# Altium PCB stencil.PcbDoc (part 2 of 2)
Units mil, origin at the board's own origin, x right, y up, seen from the top; angles counter-clockwise.
Board outline 6000 x 6360 mil, 2 copper layers (Top Layer, Bottom Layer); 167 components, 0 nets, 527 pads, 94 vias.
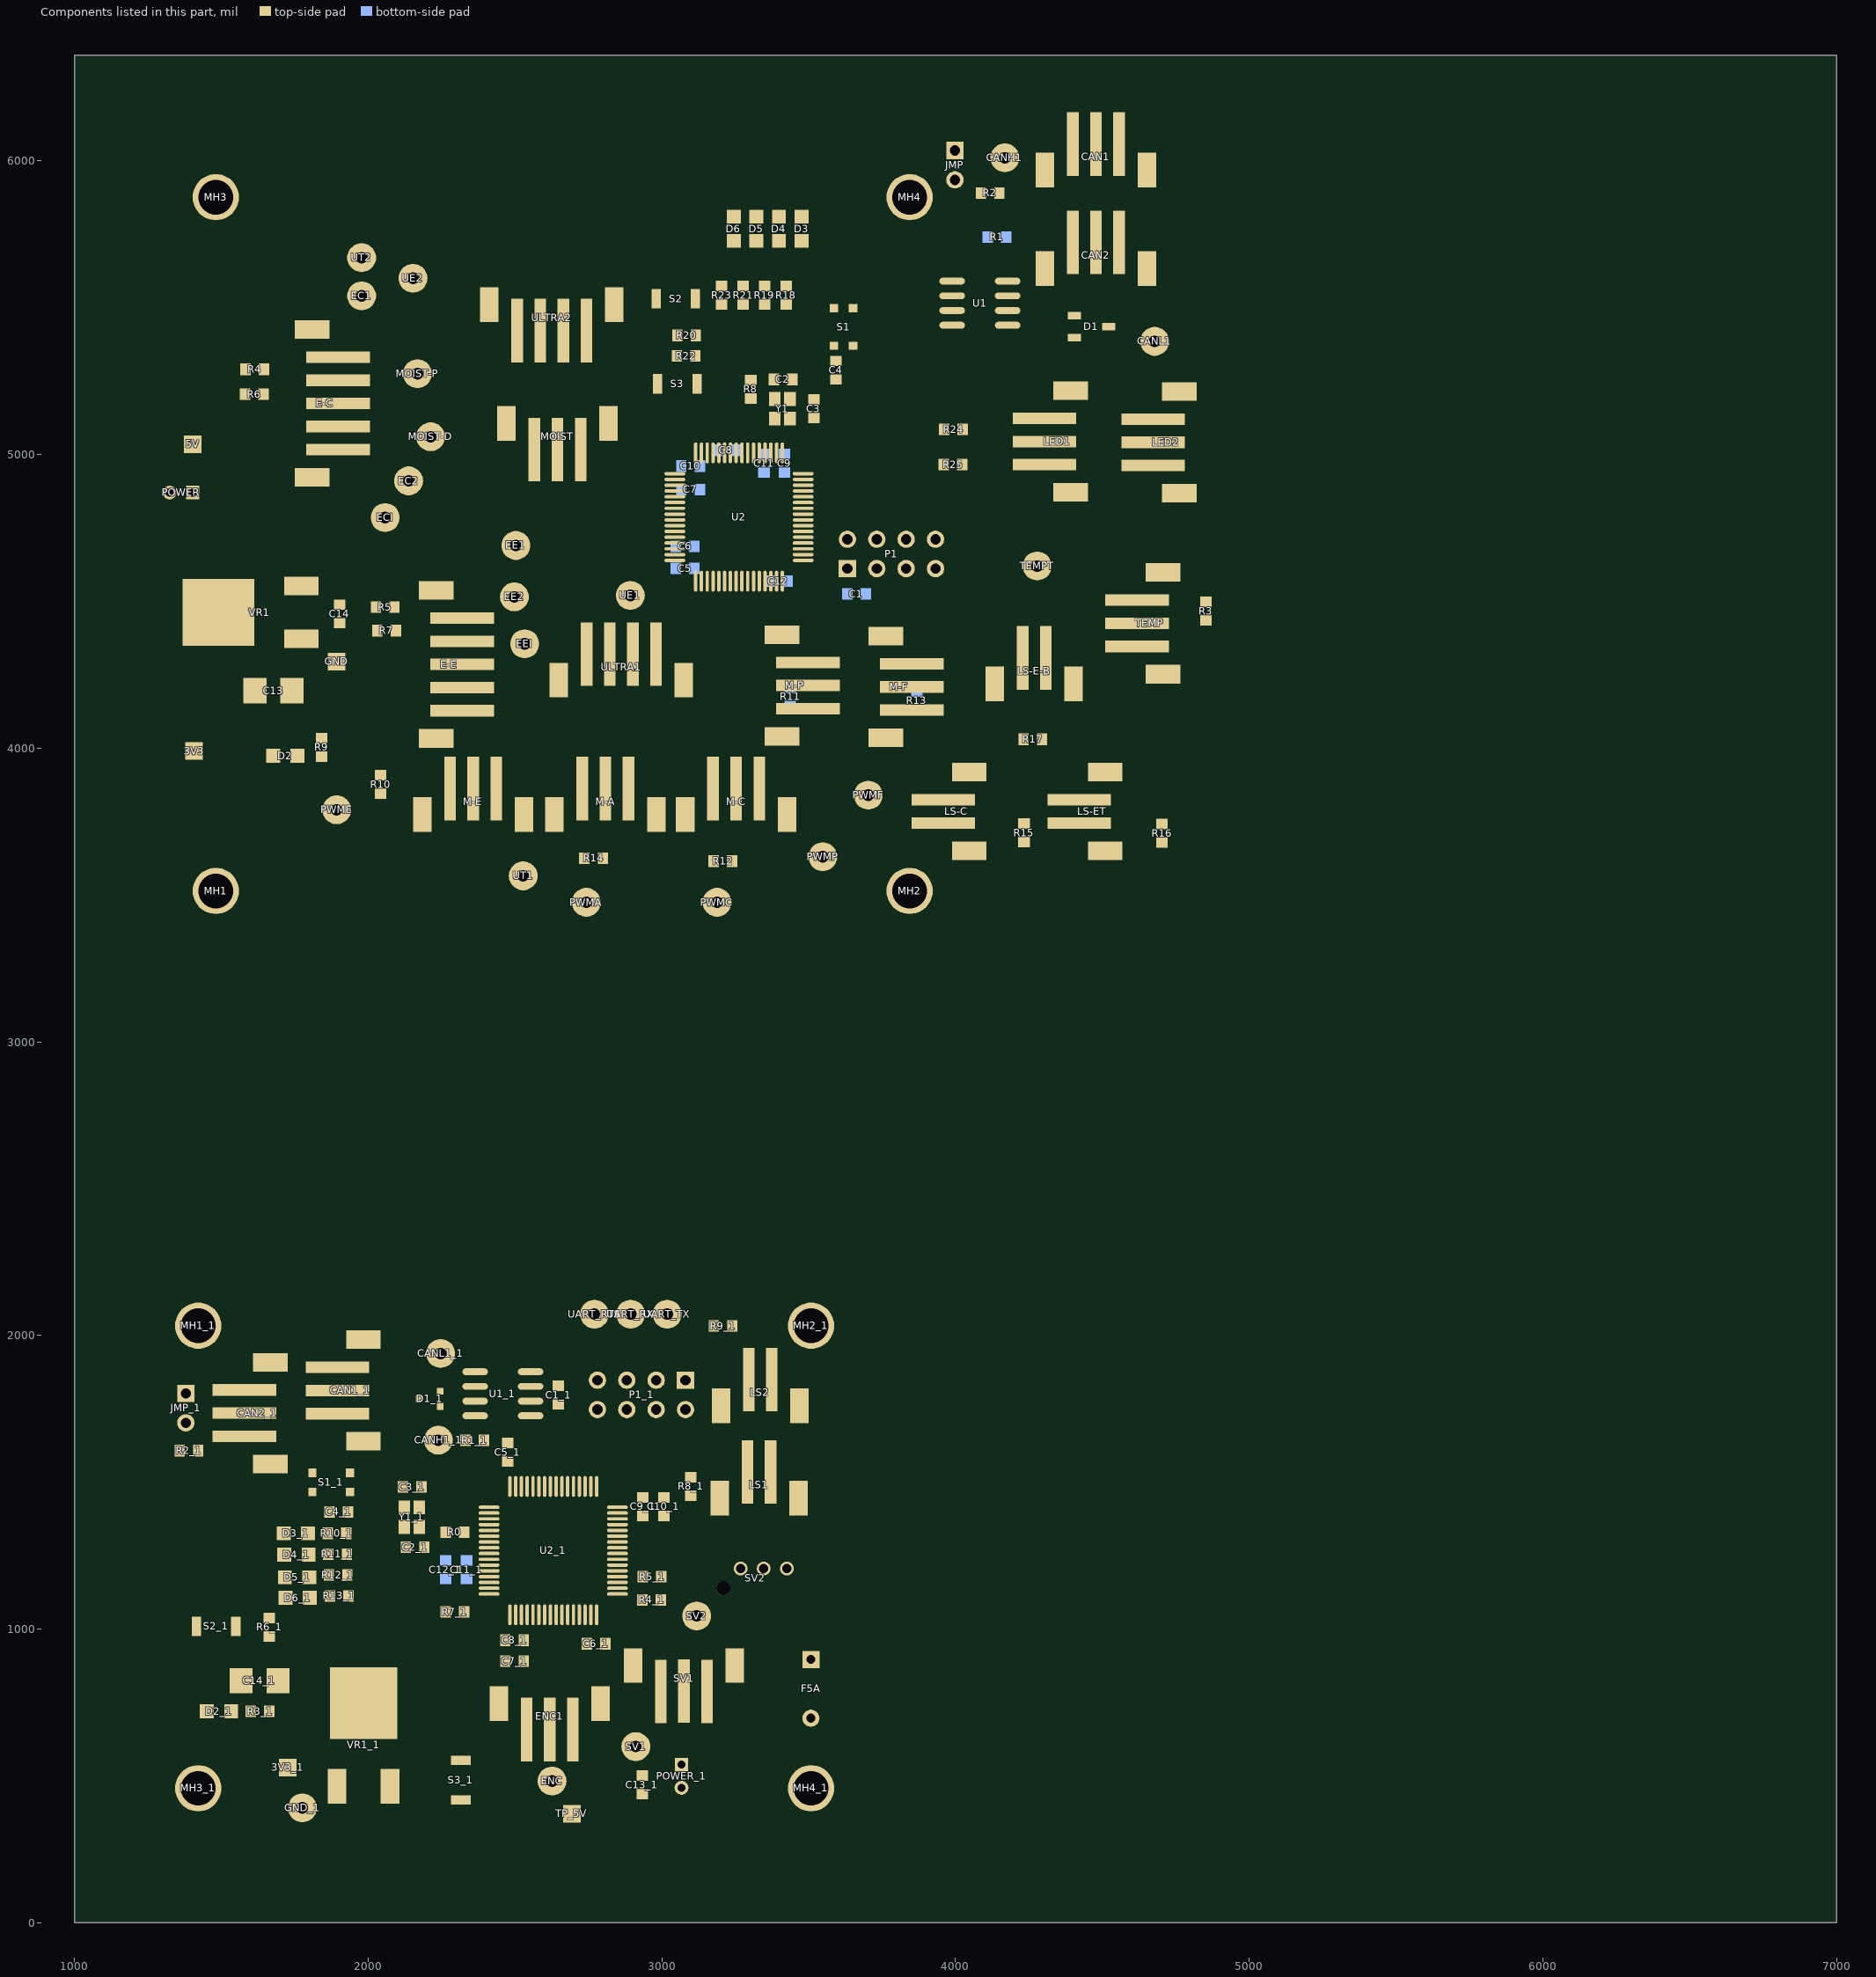
[diagram p2: the components of this part, seen from the top]

## Via types
v1: diameter 28, hole 16, Top Layer to Bottom Layer, 54 vias
v2: diameter 50, hole 28, Top Layer to Bottom Layer, 40 vias

## Nets (pads, with @x,y where several pads share a name; then routed paths per layer and width w, separated by ;. In a path a pad name is that pad's centre, name@x,y a point inside that pad or via, vN(x,y) a via of type N, cw(c..) or ccw(c..) an arc to the next point about the centre after c; other vN are vias at no path point) (continued)
copper on no net: | length 111157.8
  Top Layer w10: 1358.74,1608.11 1371.46,1620.82 1371.46,1694.51 1379.51,1702.56 ; 1379.51,1802.56 1446.36,1735.71 1579.21,1735.71 1729.94,1735.71 1806.95,1812.72 1895.53,1812.72 1963.07,1812.72 1967.01,1816.65 2043.78,1816.65 2165.83,1938.7 2247.01,1938.7 2246.28,1937.97 2246.28,1811.74 ; 1415.83,1009.57 1415.83,991.85 1461.1,946.57 v2(1461.1,840.28) ; 1421.73,1608.11 1421.73,1610.07 1453.95,1642.29 1564.53,1642.29 1579.21,1656.97 1593.9,1671.66 1713.56,1671.66 1761.19,1719.29 1880.85,1719.29 1895.53,1733.98 2041.81,1733.98 2132.36,1643.43 2239.1,1643.43 2239.1,1707.64 2245.55,1714.09 2245.55,1758.84 2245.55,1759.82 2262.3,1776.57 2364.37,1776.57 ; 1451.09,720.2 1461.1,730.21 v2(1461.1,840.28) ; 1533.77,720.2 1600.87,720.2 ; 1549.68,1009.57 1598.29,1009.57 1614.34,1025.61 1653.41,1025.61 1663.86,1036.06 ; 1579.21,1814.45 1591.33,1826.57 v2(1736.69,1826.57) 1763.05,1826.57 1781.88,1845.4 1814.24,1877.77 1881.84,1877.77 1895.53,1891.46 ; 1598.9,824.53 1598.9,826.5 1585.12,840.28 v2(1461.1,840.28) ; v1(1608.57,3973.85) 1676.65,3973.85 ; 1644.49,5205 1762.99,5205 1807.99,5250 ; 1645.99,5290 1772.99,5290 1812.99,5330 ; 1663.86,1038.33 1690.22,1064.69 2179.07,1064.69 2273.56,1159.17 2411.92,1159.17 ; v1@1679.25,5016.26 1897.99,5016.26 ; 1718.98,1106.88 1718.98,1174.75 1716.84,1176.89 1716.84,1251.66 1714.84,1253.66 1714.84,1324.56 1712.9,1326.5 1703.23,1336.17 v2(1703.23,1399.33) 1868.42,1399.33 ; 1759.33,3973.85 1839.1,3973.85 1842.05,3970.9 ; 1772.84,4371.95 1895.95,4371.95 v1(1897.99,4369.91) ; 1772.84,4551.87 1805.99,4551.87 1869.46,4488.41 1902.99,4488.41 ; 1776.06,371.77 1776.06,391.46 1776.06,468.23 v2(1815.43,507.6) 1868.27,507.6 1894.76,481.1 1894.76,465.08 ; 1795.58,1326.5 1862.68,1326.5 ; 1797.52,1253.66 1862.84,1253.66 1864.65,1255.46 ; 1799.52,1176.89 1859.07,1176.89 1866.61,1184.43 ; 1801.65,1106.88 1864.04,1106.88 1870.55,1113.4 ; 1810.51,1532.28 1810.51,1531.3 1855.87,1485.94 1855.87,1411.88 1868.42,1399.33 ; 1868.58,1399.16 1868.42,1399.33 ; 1882.99,4290 1897.99,4305 v1(1897.99,4369.91) ; 1897.99,5252.48 1990.51,5252.48 ; 1902.99,3805 2005.99,3907.99 2042.99,3907.99 2270.99,3907.99 2277.99,3915 ; 1902.99,4425.42 1902.99,4374.91 v1(1897.99,4369.91) ; 1925.67,1326.5 1948.39,1326.5 2051.03,1223.85 2234.31,1223.85 2287.39,1276.94 2411.57,1276.94 2411.92,1277.28 ; 1927.64,1255.46 1993.96,1255.46 2043.58,1205.85 2243.87,1205.85 2295.61,1257.6 2411.92,1257.6 ; 1929.61,1184.43 1933.03,1187.85 2251.32,1187.85 2301.38,1237.91 2411.92,1237.91 ; 1933.54,1113.4 2202.32,1113.4 2307.15,1218.23 2411.92,1218.23 ; 1938.46,1467.32 1938.46,1406.05 1931.57,1399.16 1931.57,1391.46 2081.18,1241.85 2226.85,1241.85 2281.62,1296.62 2411.57,1296.62 2411.92,1296.97 2412.09,1296.8 2493.69,1296.8 v2(2493.87,1296.62) ; 1977.99,5540 1977.99,5340 1982.99,5335 ; 1977.99,5670 2052.99,5745 2502.99,5745 2667.99,5580 2667.99,5435 ; 1987.99,5175 2044.99,5118 2044.99,4803 2060.49,4787.5 ; 1987.99,5255 1990.51,5252.48 ; 1987.99,5325 2092.99,5220 2092.99,5075 2327.99,4840 2532.99,4840 2556.55,4816.44 3044.49,4816.44 3049.49,4816.44 ; v1@2037.99,3765 2042.99,3770 2042.99,3845 ; 2057.99,4785 2062.55,4780.44 2322.55,4780.44 ; v2(2065.43,1777.28) 2069.01,1780.86 2169.14,1780.86 2172.72,1784.43 ; 2074.68,437.52 2074.68,465.08 ; 2089.49,4480 2124.49,4445 2257.99,4445 ; 2094.49,4400 2134.49,4360 2262.99,4360 ; 2118.58,1483.98 2118.58,1482.01 2068.03,1431.46 2068.03,1392.09 v2(2067.4,1391.46) 2067.4,1341.91 2128.43,1280.89 2128.43,1278.92 ; 2123.17,1405.07 2128.09,1409.99 ; 2123.17,1414.91 2137.85,1429.6 2137.85,1440.11 2181.72,1483.98 2183.54,1483.98 ; 2152.99,5600 2497.99,5600 2577.99,5520 ; 2167.99,5275 2552.99,5275 2717.99,5110 ; v1(2172.99,4130) 2172.99,4125 2175.51,4127.52 2320,4127.52 ; 2174.35,1338.14 2178.7,1333.79 2178.7,1281.79 2191.42,1269.07 2191.42,1271.04 2204.13,1283.76 2229.22,1283.76 2264.08,1318.62 2264.08,1320.59 ; 2174.35,1414.91 2177.38,1411.88 v2(2234.31,1411.88) ; 2183.54,1472.17 2183.54,1474.13 ; 2183.54,1482.01 2196.26,1469.29 2244,1469.29 2357.79,1355.5 2357.79,1353.89 2374.99,1336.69 2411.57,1336.69 2411.92,1336.34 ; 2212.99,5060 2357.99,5205 2577.99,5205 2642.99,5140 2642.99,5090 ; 2245.55,1810.02 2246.28,1810.75 2246.28,1811.74 ; 2279.25,3915 2279.25,3956.26 2417.99,4095 3112.99,4095 3136.99,4119 3136.99,4566.46 3135.04,4568.41 ; 2291.81,411.14 2309.53,411.14 2453.79,555.4 2540.91,555.4 2555.59,570.09 2555.59,658.67 ; 2291.81,545 2309.53,545 2309.53,987.91 2327.11,1005.49 2327.11,1058.78 2339.82,1071.5 2339.82,1103.97 2374.99,1139.14 2411.57,1139.14 2411.92,1139.49 ; 2322.99,4780 2322.55,4780.44 ; 2325,4363.74 2416.73,4363.74 2472.99,4420 2472.99,4490 2497.99,4515 ; 2327.08,1320.59 2331.01,1316.65 2411.89,1316.65 ; 2331.18,1642.75 2323.31,1634.87 2323.31,1586.06 v2@2332.87,1576.5 ; 2357.99,3852.01 2357.99,3862.01 2357.99,3950 2482.99,4075 3127.54,4075 3154.99,4102.46 3154.99,4568 ; 2357.99,4455 2362.99,4460 ; 2362.99,4455 2362.99,4460 ; 2364.37,1726.57 2391.82,1726.57 2391.82,1649.04 2398.11,1642.75 ; 2364.37,1826.57 2261.12,1826.57 2246.28,1811.74 ; 2411.57,1356.37 2411.92,1356.02 ; 2411.92,1178.86 2412.09,1179.03 2569.71,1179.03 v2(2569.89,1179.2) ; 2411.92,1198.54 2412.27,1198.89 2453.57,1198.89 2484.72,1230.04 v2(2492.6,1230.04) ; 2411.92,1415.08 2482.79,1415.08 ; 2417.99,4120 2422.39,4124.4 ; 2422.99,4295 2482.99,4355 2532.99,4355 2557.99,4355 ; v1(2432.99,5335) 2433.5,5334.49 2507.48,5334.49 2507.48,5421.42 ; 2436.73,3852.01 2436.73,3701.26 2437.99,3700 v1(2437.99,3695) ; 2463.88,967.25 2467.01,964.12 ; 2467.01,891.12 2467.01,964.12 ; 2467.01,962.16 2467.01,964.12 ; 2474.88,1570.76 2482.79,1562.85 2482.79,1485.94 ; 2482.99,4670 2362.99,4550 2362.99,4460 ; v2(2496.53,1127.68) 2502.12,1122.09 2502.12,1049.28 2502.47,1048.94 2502.47,998.5 2494.95,990.98 2493.87,990.98 2467.01,964.12 ; 2502.82,1485.6 2502.47,1485.94 2502.47,1542.56 2507.57,1547.66 2507.57,1603.03 2476.85,1633.75 2474.88,1633.75 2472.91,1633.75 2476.85,1637.69 v2(2476.85,1694.61) 2479.88,1697.64 2479.88,1734.61 2521.85,1776.57 2553.35,1776.57 2636.9,1776.57 2648,1765.47 ; 2502.99,4530 2707.99,4735 2917.99,4735 2920.7,4737.7 2950.45,4737.7 2950.75,4738 3044.19,4738 3044.49,4737.7 ; 2507.99,4710 2553.7,4755.7 2942.99,4755.7 ; 2522.16,1485.94 2522.16,1536.79 2525.57,1540.2 2525.57,1720.28 2531.86,1726.57 2553.35,1726.57 ; 2530,962.16 2522.16,970 2522.16,1048.94 2522.5,1049.28 2522.5,1087.55 2569.89,1134.93 ; 2541.84,1485.94 2542.19,1486.29 2542.19,1531.37 2543.57,1532.75 2543.57,1566.44 2690.02,1712.9 2690.02,1845.61 2659.05,1876.57 2553.35,1876.57 ; 2557.99,4350 2557.99,4355 ; v1(2562.99,5160) 2562.99,5165 2566.02,5168.03 2566.02,5016.42 ; 2567.99,4355 2557.99,4355 ; 2577.99,5510 2577.99,5520 ; 2582.99,5515 2577.99,5520 ; 2586.22,5421.42 2587.99,5419.65 2587.99,5330 2732.99,5185 2857.99,5185 3042.99,5000 3042.99,4935 ; 2618.58,658.67 2618.58,800.91 2677.64,859.96 2677.64,962.29 2719.01,1003.66 2719.01,1048.94 ; 2626.46,483.18 2626.46,650.8 2634.33,658.67 2634.33,747.26 ; 2644.76,5016.42 2644.76,4928.23 2717.99,4855 3037.99,4855 ; 2664.96,5421.42 2664.96,5333.03 2794.99,5203 2879.99,5203 3062.99,5020 3112.99,5020 ; 2669.41,347.8 2685.51,363.9 2693.39,371.77 ; 2679.64,1485.94 2679.64,1627.71 2708.02,1656.09 2708.02,1785.23 2770.55,1847.76 ; v1(2682.99,4440) 2687.99,4440 2707.99,4460 2822.99,4460 ; 2697.32,658.67 2697.32,570.09 2712.01,555.4 2845.15,555.4 2902.8,497.76 ; 2719.01,1485.94 2719.01,1633.24 2732.76,1646.99 2732.76,1762.7 2762.34,1792.28 2815.08,1792.28 2870.55,1847.76 ; 2723.5,5016.42 2723.5,4929.49 2777.99,4875 3037.99,4875 ; 2729.25,3625 2729.25,3862.01 2729.25,3936.26 2727.99,3937.52 2727.99,4015 2762.99,4050 3127.99,4050 3172.99,4095 3172.99,4570 ; 2732.76,962.16 2732.76,964.12 2758.38,989.74 2758.38,1048.94 2758.03,1049.28 2758.03,1087.64 2736.69,1108.98 v2(2736.69,1119.81) ; 2732.99,3625 2737.99,3620 2737.99,3475 ; 2738.69,1485.94 2738.69,1529.28 2827.45,1618.04 2827.45,1757.39 2836.26,1766.2 2872.34,1802.28 2925.08,1802.28 2970.55,1847.76 ; v2(2764.25,1359.96) 2775.08,1359.96 2790.82,1375.71 2848.93,1375.71 ; 2770.55,2078.46 2775.67,2073.35 2775.67,1852.87 2780.79,1847.76 ; v2(2776.06,1682.8) 2778.43,1685.16 2778.43,1745.39 2780.79,1747.76 ; 2778.06,1048.94 2778.06,981.81 2795.75,964.12 2795.75,962.16 ; 2778.06,1485.94 2778.06,1499.75 2880.79,1602.48 2880.79,1747.76 ; 2799.49,3625 v1(2852.99,3625) ; 2807.99,3862.01 2807.99,4010 2829.99,4032 3135.45,4032 3192.99,4089.54 3192.99,4555 ; 2822.99,4320 2822.99,4460 ; 2848.93,1139.49 2849.27,1139.14 2896.32,1139.14 2933.74,1101.72 2933.74,1099.75 2946.46,1087.04 2946.46,1013.3 2981.85,977.91 2981.85,878.58 2996.54,863.9 2996.54,787.71 2996.54,714.29 2911.44,629.19 2911.44,600.41 ; 2848.93,1178.86 2935.34,1178.86 2935.51,1178.69 2935.51,1180.66 2969.15,1214.29 3244.57,1214.29 3260.32,1198.54 3260.32,1111.93 3209.13,1060.75 3157.95,1060.75 3150.08,1052.87 3118.58,1052.87 ; 2848.93,1277.28 3178.3,1277.28 3233.94,1332.93 3283.94,1382.92 3283.94,1527.45 ; 2848.93,1336.34 2912.88,1336.34 2926.66,1322.56 v2(2937.48,1322.56) ; 2848.93,1395.39 2926.1,1395.39 2935.71,1385.79 2935.94,1385.55 3006.74,1385.55 3006.98,1385.79 3009.18,1383.58 v2(3067.4,1383.58) ; 2848.93,1415.08 2900.04,1415.08 2933.74,1448.78 2935.71,1448.78 ; 2880.79,1847.76 2887.48,1854.45 2887.48,2073.74 2894.17,2080.43 ; 2886.73,3862.01 2886.73,3726.26 v1(2887.99,3725) ; 2892.99,4520 2892.99,4625 2947.99,4680 3047.99,4680 ; 2901.73,4320 2901.73,4513.74 2902.99,4515 ; 2942.99,4756.91 3015.84,4756.91 ; v1(2967.99,4905) 2972.99,4910 2987.81,4895.18 3044.49,4895.18 ; 2977.99,4581.91 2977.99,4600.69 3016.58,4639.28 3044.49,4639.28 ; 2980.47,4320 2980.47,4462.48 v1(2982.99,4465) ; v1@2980.67,4655 2977.99,4652.32 v1(2977.99,4650) 2986.96,4658.96 3044.49,4658.96 3042.8,4657.28 ; 2980.79,1847.76 3018.19,1885.16 3018.19,2072.56 ; 2981.06,5530 v1(3047.99,5530) ; 2986.07,5240 v1(3047.99,5240) ; v1@2992.99,4965 2992.99,4930 3008.13,4914.87 3044.49,4914.87 ; 2996.73,1099.75 3008.18,1111.2 3031.24,1111.2 v2@3041.81,1121.77 ; 2996.73,1176.92 2998.5,1178.69 3009.42,1167.77 3031.24,1167.77 3041.81,1157.2 v2(3041.81,1137.52) v2@3041.81,1121.77 ; 3037.99,4699 2891.99,4699 2822.99,4630 2822.99,4460 ; 3043.86,4835.5 3044.49,4836.13 ; 3044.49,4718.02 3043.47,4717 3007.92,4717 3004.92,4720 2958.2,4720 2955.2,4717 2874.99,4717 2557.99,4400 2557.99,4355 ; 3044.49,4777.07 3012.9,4777.07 3009.97,4780 2660.61,4780 2660.17,4780.44 2322.55,4780.44 ; 3044.49,4796.76 3042.8,4798.44 2549.1,4798.44 2542.54,4805 2222.99,4805 2062.99,4965 2062.99,5180 1990.51,5252.48 ; 3067.18,538.74 3067.18,796.16 3075.28,804.26 ; 3098.9,1517.79 3101.75,1520.64 3277.13,1520.64 3283.94,1527.45 ; 3114.49,5335 3114.49,5248.5 3117.99,5245 ; 3114.92,5530 3114.92,5403.07 3117.99,5400 ; 3115.99,5405 3153.04,5367.94 3153.04,5020.05 ; 3122.99,5230 3122.99,5058.07 3134.99,5046.07 3134.99,5005.47 3135.04,5005.42 ; 3152.99,5020 3153.04,5020.05 ; 3153.04,5005 3153.04,5020.05 ; 3154.02,802.87 3154.02,891.46 3041.81,1003.66 v2@3041.81,1121.77 ; 3154.99,4570 3154.99,4573 ; 3174.41,5005.42 3174.41,4928.58 v1(3177.99,4925) ; 3187.99,3440 3174.25,3453.74 3174.25,3862.01 3177.99,3865.75 3177.99,4049.09 3210.99,4082.09 3210.99,4562.46 3210,4563.45 3210,4567.01 3212.99,4570 ; 3194.1,5005.42 3194.1,4958.9 v1@3222.99,4930 ; 3203.47,5510.53 3177.99,5485.06 3177.99,5100.46 3192.41,5086.04 3192.41,5085.58 3212.1,5065.9 3212.1,4995.9 3212.99,4995 ; 3203.47,5573.53 3245.04,5615.1 3245.04,5726.98 ; 3232.99,5005 3232.99,5070.91 3197.99,5105.91 3197.99,5431.73 3276.8,5510.53 ; 3233.47,4568.41 3235.15,4566.72 3235.15,4242.29 3252.99,4224.45 3252.99,3940 ; 3239.49,3615 v1(3292.99,3615) ; 3240.21,2032.44 3240.21,2030.47 3268.98,2001.69 3295.75,2001.69 v2@3302.56,2008.5 ; v1(3242.99,5900) 3245.04,5897.95 3245.04,5809.66 ; 3252.99,5010 3250.99,5012 3250.99,5078.37 3217.99,5111.37 3217.99,5378.4 3350.13,5510.53 ; 3253.15,4568.41 3253.15,4249.75 3352.9,4150 v1(3352.99,4150) 3493.22,4150 3497.68,4145.53 ; 3271.99,5035 3271.99,5083.86 3237.99,5117.86 3237.99,5325.06 3423.47,5510.53 ; 3272.84,4568.41 3274.52,4566.72 3274.52,4258.47 3353.99,4179 3595.27,4179 3627.99,4146.28 3627.99,3790 3672.99,3745 3957.99,3745 4227.99,3745 4232.99,3750 ; 3276.8,5573.53 3322.99,5619.72 3322.99,5726.01 3322.03,5726.98 ; 3278.2,1548.94 3291.81,1535.32 3283.94,1527.45 ; 3287.87,1849.53 3302.56,1864.22 v2@3302.56,2008.5 ; 3292.52,4568.41 3292.99,4567.94 3292.99,4318.99 3356.98,4255 3597.99,4255 3607.99,4245 3962.99,4245 3982.99,4225 3982.99,4160 3942.48,4119.49 3851.57,4119.49 ; 3292.52,5005.42 3292.52,5037.13 3292.99,5037.6 3292.99,5098.53 3257.99,5133.53 3257.99,5270 3312.99,5325 3586.4,5325 ; 3292.99,5188.92 3292.99,5123.99 3312.21,5104.78 3312.21,5042.9 3312.21,5039.12 ; 3292.99,5251.91 3296.5,5255.42 3381.5,5255.42 3381.5,5192.27 3384.93,5188.84 ; v2(3307.56,2013.5) v2@3302.56,2008.5 ; v1@3317.99,5900 3322.03,5895.97 3322.03,5809.66 ; 3331.73,3862.01 3331.73,3718.74 3327.99,3715 v1(3332.99,3710) ; 3331.89,4568.41 3331.89,4475.65 3368.54,4439 3857.99,4439 4022.99,4274 4022.99,4055 4322.99,3755 ; 3332.21,5005.42 3332.21,5058.06 3344.05,5069.9 3419.39,5069.9 3437.21,5087.72 3437.21,5128.45 ; v1(3337.99,5130) 3372.99,5130 3382.99,5120 3387.99,5125 ; 3350.13,5573.53 3399.01,5622.41 3399.01,5726.98 ; 3351.58,4568.41 3349.89,4566.73 3349.89,4483.1 3375.99,4457 3865.45,4457 4015.44,4307.01 4228.62,4307.01 4228.62,4020.63 4227.99,4020 ; v1(3362.99,4635) 3366.7,4635 3390.95,4610.75 3390.95,4568.41 ; v1@3365,4302.23 3365.79,4303.01 3497.68,4303.01 ; 3366.61,1849.53 3370.55,1845.6 ; 3371.26,4568.41 3371.26,4516.73 v1@3392.99,4495 ; v1@3387.99,4855 3447.86,4914.87 3481.5,4914.87 ; v1@3392.99,5900 v1(3397.99,5895) 3399.01,5893.98 3399.01,5809.66 ; 3397.97,5126.91 3399.81,5128.75 ; 3410.63,4568.41 v1(3481.15,4568.41) ; 3410.63,5000 3410.63,4962.64 3438.27,4935 3462.99,4935 ; 3423.47,5573.53 3476,5626.06 3476,5726.98 ; 3444.49,5255.42 v1(3522.69,5255.42) ; 3447.99,4660 3445.99,4658 ; 3450.99,5121.36 3450.99,5128.75 3517.72,5128.75 3521.66,5132.68 ; 3476,5809.66 3476,5893.01 v1(3477.99,5895) ; 3477.99,4660 3475.99,4658 3445.99,4658 ; 3481.5,4639.28 3482.22,4640 3512.99,4640 3586.33,4566.66 3850.38,4566.66 3882.99,4599.28 3882.99,4640 3831.93,4691.06 3831.93,4711.19 ; 3481.5,4678.65 3554.35,4678.65 3577.28,4655.72 3687.41,4655.72 3731.93,4611.19 ; 3481.5,4698.33 3556.1,4698.33 3613.49,4755.72 3650.38,4755.72 3676.46,4729.63 3676.46,4695.94 3716.69,4655.72 3750.38,4655.72 3794.91,4611.19 3831.93,4611.19 ; 3481.5,4737.7 3570.02,4737.7 3606.03,4773.72 3832.38,4773.72 3887.41,4718.69 3887.41,4661.04 3927.99,4620.46 ; 3481.5,4875.5 3538.94,4875.5 3847.99,5184.54 3847.99,5395 3892.99,5440 3988.51,5440 ; 3481.5,4895.18 3533.18,4895.18 3829.99,5192 3829.99,5402.46 3889.35,5461.81 4049.8,5461.81 4052.99,5465 4052.99,5560 4027.99,5585 ; 3497.99,4775 3581.86,4775 3598.58,4791.72 3786.72,4791.72 3960,4965 ; 3502.99,4795 3576.41,4795 3591.12,4809.72 3686.21,4809.72 3961.5,5085 ; 3517.72,5186.87 3522.69,5191.85 v1(3522.69,5255.42) ; 3547.99,3630 3547.99,4135 ; 3585.87,5369.79 3585.87,5325.54 3586.4,5325 ; 3587.99,5370 3852.99,5635 4067.99,5635 4036.92,5603.93 4070.99,5569.85 4070.99,5457.54 4057.26,5443.81 4054.66,5443.81 3992.99,5382.15 3992.99,4795 3931.93,4733.94 3931.93,4711.19 ; 3592.99,5255.42 v1(3522.69,5255.42) ; 3592.99,5318.41 3586.4,5325 ; 3650.83,5497.74 3650.83,5536.75 v1@3650.99,5536.91 ; 3702.99,3840 3672.99,3870 3672.99,4105 v1@3702.99,4135 ; v1(3707.99,4285) 3709.96,4286.97 3851.57,4286.97 ; v1(3712.99,4130) 3713.5,4129.49 3851.57,4129.49 ; v1(3807.99,3830) 3897.99,3830 3902.99,3825 ; 3927.99,4605 3927.99,4620.46 ; 3927.99,4625 3927.99,4620.46 ; 3931.93,4611.19 3931.93,4616.52 3927.99,4620.46 ; 3997.99,5935 4042.99,5935 4082.99,5895 ; 3997.99,6060 3997.99,6090 4092.99,6185 4437.99,6185 4477.99,6145 4477.99,6057.01 4477.99,5722.01 4477.99,5700 4472.99,5695 ; 4022.99,4965 4127.99,4965 4206.73,5043.74 4302.99,5043.74 4296.73,5050 4202.99,5050 ; 4022.99,5085 4024.49,5085 4412.99,5085 4456.73,5041.26 4672.99,5041.26 ; 4136.97,5490 4192.99,5490 4282.99,5400 4402.99,5400 4405.4,5397.6 ; 4152.99,5540 4197.99,5540 4265.59,5472.4 4404.92,5472.4 ; 4152.99,5882.99 4152.99,6005 4168.4,6007.72 4195.49,6012.5 ; 4157.99,6040 4202.99,6085 4397.99,6085 ; 4162.99,5980 4195.49,6012.5 ; 4167.99,5585 4172.99,5590 v1(4172.99,5685) ; 4181.85,6025.06 4195.49,6012.5 ; v1(4232.99,5180) 4232.99,5125 4300.47,5125 4302.99,5122.48 ; 4277.99,4620 4277.99,4480 4272.99,4475 ; 4394.25,5742.01 4394.25,5483.74 4407.99,5470 ; 4399.25,5722.01 4399.25,6057.01 ; 4407.99,5395 4405.4,5397.6 ; 4420.98,3745 4702.99,3745 4707.99,3740 ; 4420.98,3824.37 4567.36,3824.37 v1@4566.73,3825 ; 4472.99,5660 4472.99,5455 4415.59,5397.6 ; 4521.06,5435 v1(4587.99,5435) ; 4556.73,5722.01 4556.73,5783.74 4557.99,5785 v1(4622.99,5785) ; 4556.73,6057.01 4556.73,6123.74 4557.99,6125 v1(4632.99,6125) ; v1(4592.99,5185) 4592.99,5120 4672.99,5120 ; 4617.99,4418.74 4681.73,4418.74 ; 4617.99,4425 4527.99,4425 4477.99,4475 4272.99,4475 ; 4672.99,5385 4667.99,5380 4433.19,5380 4415.59,5397.6 ; 4677.99,4415 4681.73,4418.74 ; 4852.99,4435 4697.99,4435 4681.73,4418.74 ; 3445.99,4658 3422.99,4635 3422.99,4620 3445.58,4597.41 3493.16,4597.41 3615.57,4475 3872.91,4475 4272.99,4475 ; 4405.4,5397.6 4415.59,5397.6
  Top Layer w15: 1227.99,4735 1227.99,5375 2062.99,6210 2907.99,6210 ; 1402.99,4865 1402.99,4870 ; 1407.99,3990 1407.99,4150 1412.99,4155 ; 1577.99,5290 1577.99,5095 ; 1582.99,5290 1582.99,5695 1672.99,5785 2632.99,5785 2742.99,5675 2742.99,5465 ; 1592.99,4155 1672.99,4075 1802.99,4075 1842.99,4035 ; 1627.99,4195 1631.65,4191.34 ; 1661.89,824.53 1718.98,824.53 v2(1742.6,848.15) 1813.26,918.81 1813.26,927.09 1765.02,975.33 1663.86,975.33 ; 1663.86,720.2 1764.25,720.2 1772.13,728.07 ; 1726.85,529.25 1744.57,546.97 v2(1744.57,615.87) ; 1767.99,4545 1762.99,4550 1762.99,4815 1462.99,4815 1407.99,4870 1402.99,4870 ; 1822.99,5095 1577.99,5095 ; 1902.99,4488.41 2016.4,4488.41 ; 2021.5,4480 2021.5,4490 ; 2026.5,4480 2026.5,4406.5 2032.99,4400 ; 2031.5,4400 2031.5,4396.5 2217.99,4210 ; 2138.27,954.45 2161.75,954.45 2264.11,1056.81 2264.11,1058.78 ; v2@2189.45,942.64 v2(2264.25,942.64) v2@2264.25,953.46 ; 2325,4206.26 2494.25,4206.26 2652.99,4365 2742.99,4365 ; 2474.88,1570.76 2436.85,1608.79 2436.85,1659.25 2434.35,1661.75 2434.35,1739.08 2521.85,1826.57 2553.35,1826.57 2646.11,1826.57 2648,1828.46 ; 2481.06,1485.94 2481.06,1416.8 2482.79,1415.08 2482.79,1381.58 2569.89,1294.48 v2(2569.89,1179.2) ; 2526.06,891.12 2530,895.06 2530,962.16 ; 2569.89,1134.93 v2(2569.89,1179.2) ; 2744.25,4320 2744.25,4178.74 v1(2747.99,4175) ; 2779.78,1048.94 2780.63,1049.79 2780.63,1136.37 2737.8,1179.2 v2(2569.89,1179.2) ; 2848.93,1416.8 2681.7,1416.8 2602.83,1337.93 2602.83,1212.15 v2(2569.89,1179.2) ; 2935.71,1448.78 3006.51,1448.78 3006.74,1448.54 3092.65,1448.54 3098.9,1454.8 ; v1@2961.49,4911.5 v1(2967.99,4905) ; 3051.5,5335 3051.5,5403.5 3052.99,5405 2972.99,5405 2907.99,5470 2907.99,6210 ; 3080.79,1847.76 3173.28,1940.25 3173.28,2028.5 3177.21,2032.44 3177.21,2018.99 ; v1(3357.99,4220) 3447.99,4220 ; 3410.63,5000 3467.99,5000 3697.99,5230 3697.99,5415 3772.99,5490 3947.99,5490 ; 3500.91,4210 3832.99,4210 3847.99,4195 ; v1@3932.99,5540 3988.51,5540 ; 4232.99,3675 4232.99,3630 4302.99,3560 4617.99,3560 4702.99,3645 4702.99,3680 ; 4242.99,4970 4250.47,4962.52 4602.99,4962.52 ; 4294.49,4030 4947.99,4030 ; 4312.99,4340 v1(4412.99,4340) 4522.99,4340 4527.99,4345 ; 4602.99,4965 4602.99,4962.52 ; 4617.99,4497.48 4625.51,4505 4947.99,4505 ; 4672.99,4962.52 4602.99,4962.52 ; 4702.99,3685 4702.99,3680 ; v1(4807.99,4750) 4657.99,4750 4602.99,4805 4602.99,4962.52 ; 1402.99,4870 1402.99,5035 1462.99,5095 1577.99,5095 ; 2907.99,6210 4822.99,6210 4952.99,6080 4952.99,4650 4952.99,3845 4787.99,3680 4702.99,3680
  Top Layer w31.5: 2074.68,437.52 2148.31,363.9 2685.51,363.9 ; 2693.39,371.77 2819.37,497.76 2902.8,497.76 2912.26,497.76 ; 2933.54,438.7 2987.99,438.7 3009.29,460 3067.18,460 ; 2933.54,501.69 2956.5,501.69 2993.55,538.74 3067.18,538.74 ; 3370.55,1499.75 3370.55,1359.96 3421.73,1308.78 3421.73,1218.23 ; 3370.55,1535.32 v2(3370.55,1694.61) 3370.55,1845.6
  Top Layer w55.12: 3067.18,538.74 3289.49,538.74 3445.75,695 3476.85,695 ; 3342.99,1202.48 3342.99,1028.86 3474.88,896.97 3507.67,896.97
  Bottom Layer w10: v2(2493.87,1296.62) 2776.06,1578.82 v2(2776.06,1682.8) ; 2527.99,3570 2682.99,3725 v1(2682.99,4440) ; v2(2764.25,1359.96) 2980.79,1576.5 2980.79,1747.76 ; v2(2937.48,1322.56) 3062.95,1322.56 3307.56,1567.17 v2(3307.56,2013.5) ; 3047.8,4611.91 3047.8,4684.8 ; 3047.8,4686.91 3047.8,4814.8 3067.99,4835 3067.99,4890 ; 3067.17,4960.82 3126.35,5020 3182.99,5020 ; v1(3177.99,4925) 3187.81,4934.82 3187.81,5014.32 3218.5,5045 3297.99,5045 3342.99,5000 3347.99,5000 ; 3347.99,5001.5 3417.99,5001.5 3419.49,5001.5 3422.99,5005 ; v1(3352.99,4150) 3424.34,4150 3428.8,4145.53 3437.21,4153.94 ; v1(3402.99,4490) 3408.31,4495.31 3653.36,4495.31 3659.21,4501.17 3659.21,4558.2 3676.46,4575.45 3676.46,4653.47 3727.99,4705 ; 3422.99,5000 v1(3472.99,5000) ; 3631.5,4610.75 3631.93,4611.19 ; v1@3717.99,4125 3722.99,4130 3867.99,4130 ; 3731.93,4596.06 3731.93,4611.19 ; 3929.18,4711.19 3931.93,4711.19 ; 4162.99,5745 4172.99,5735 v1(4172.99,5685)
  Bottom Layer w15: 1402.99,4870 1292.99,4980 1205.96,4980 1185.96,4960 1185.96,3562.03 1382.99,3365 4817.99,3365 4912.99,3460 4912.99,4655 4907.99,4655 4812.99,4750 v1(4807.99,4750) ; 1567.99,4640 1992.99,4640 2027.99,4605 2952.99,4605 v1(2987.99,4570) ; 2264.08,1170.98 2335.12,1170.98 2343.34,1179.2 2487.55,1179.2 ; v2(2264.25,942.64) 2370.03,1048.42 2370.03,1061.68 2487.55,1179.2 ; v1(2747.99,4175) 3312.99,4175 v1(3357.99,4220) ; v1(2967.99,4905) v1@2972.54,4905 ; v1@2987.99,4565 2990.88,4565 3032.8,4606.91 3037.8,4601.91 3047.8,4611.91 ; 3052.99,4600 3052.99,4545 3082.99,4515 3374.58,4515 3427.99,4568.41 v1(3481.15,4568.41) 3529.55,4520 3627.99,4520 ; 3052.99,4890 3037.99,4905 v1@2972.54,4905 ; 3062.99,4965 3032.54,4965 v1@2972.54,4905 ; 3080.79,1847.76 3150.08,1778.46 3150.08,1615.87 2713.42,1179.2 v2(2569.89,1179.2) 2487.55,1179.2 ; 3631.5,4525 3631.5,4610.75
  other v1: 2037.99,3770 4562.99,3825 1822.99,4150 1822.99,4197.5 1822.99,4245 3352.99,4300 3392.99,4855 3232.99,4925 2992.99,4970 1667.99,5020 3922.99,5540 3650.36,5541.91 3322.99,5900
  other v2: 2443.39,545 2191.42,615.87 1811.5,667.05 2150.08,667.05 1746.54,726.1 2189.45,726.1 1819.37,785.16 2146.14,789.09 2191.42,859.96 2114.65,907.2 1819.37,911.67 1976.85,911.67 2051.03,954.45 1886.3,958.39 2183.54,958.39 1748.5,962.16 2323.31,1576.5

## Polygon pours and split planes (outlines as drawn)
no net on Bottom Layer "bot3v3" (solid, pour order 12): 2236.57,1006.83 2236.57,571.83 1701.57,571.83 1701.57,1006.83
no net on Bottom Layer "Bottom Layer-No Net" (solid, pour order 10): 1323.31,2151.3
no net on Bottom Layer "Bottom Layer-GND" (solid, pour order 8): 1224.88,2230.04 3705.2,2230.04 3705.2,261.54 1224.88,261.54
no net on Bottom Layer "GND-+3V3" (solid, pour order 2): 1162.99,4765 1162.99,4130 1662.99,4130 1662.99,4765
no net on Bottom Layer "GND pour" (solid, pour order 0): 1197.99,6269.61 1197.99,3360 5097.99,3360 5097.99,6269.61 2997.99,6269.61
no net on Top Layer "top3v3" (solid, pour order 14): 2231.57,578.33 2231.57,996.83 1706.58,996.83 1706.57,578.33
no net on Top Layer "3V3 top" (solid, pour order 6): 1663.89,4765 1663.89,4130 1088.89,4130 1088.89,4765
no net on Top Layer "Top Layer-GND" (solid, pour order 4): 1702.99,4405 1852.99,4405 1852.99,4125 1702.99,4125

## Keep-outs
Keep-Out Layer:
  lines w47.24: 5052.99,3300 5052.99,6269.61 ; 1127.99,3290 1127.99,6269.61 ; 1127.99,3290 5052.99,3290 5052.99,6269.61 ; 1127.99,3290 1127.99,6269.61 ; 1127.99,6269.61 5052.99,6269.61 ; 1127.99,6269.61 5052.99,6269.61 ; 1201.26,261.54 ccw(c1224.88,261.54) 1224.88,237.91 ; 1201.26,261.54 ccw(c1224.88,261.54) 1224.88,237.91 ; 1201.26,261.54 1201.26,2230.04 ; 1201.26,2230.04 cw(c1224.88,2230.04) 1224.88,2253.66 ; 1201.26,2230.04 cw(c1224.88,2230.04) 1224.88,2253.66 ; 1224.88,237.91 3705.2,237.91 ; 1224.88,2253.66 3705.2,2253.66 ; 3705.2,237.91 ccw(c3705.2,261.54) 3728.82,261.54 ; 3705.2,237.91 ccw(c3705.2,261.54) 3728.82,261.54 ; 3705.2,2253.66 cw(c3705.2,2230.04) 3728.82,2230.04 ; 3705.2,2253.66 cw(c3705.2,2230.04) 3728.82,2230.04 ; 3728.82,261.54 3728.82,2230.04

## Other copper
Top Layer:
  pour cut-out: 2730.6,4711.44
Bottom Layer:
  pour cut-out: 1305.47,4740.17
  pour cut-out: 1495.49,4715.69

## Silkscreen, mask and mechanical layers (free items; w line width, h text height)
Top Overlay:
  text "Science Board  / Rev. 2 / Adrianna Ascalon" at 1697.99,5875 h40
  text "Gimbal Board 2019_Rev_1 M.Zhang & E.Hou" at 1539.84,2151.3 h50

## Text inside footprints (layer, text, board x,y; h text height)
P1: Top Overlay "GND" at 3643.75,4786.23 h30 r90; Top Overlay "VCC" at 3639.81,4455.52 h30 r90; Top Overlay "RST" at 3943.75,4786.23 h30 r90; Top Overlay "CLK" at 3844.53,4782.29 h30 r90; Top Overlay "IO" at 3742.17,4786.23 h30 r90; Top Overlay "RTS" at 3950.83,4458.47 h30 r90; Top Overlay "RX" at 3844.53,4487.09 h30 r90; Top Overlay "TX" at 3742.17,4487.09 h30 r90
P1_1: Top Overlay "GND" at 3068.98,1672.72 h40 r270; Top Overlay "VCC" at 3072.91,2003.43 h40 r270; Top Overlay "RST" at 2768.98,1672.72 h40 r270; Top Overlay "CLK" at 2868.19,1676.65 h40 r270; Top Overlay "IO" at 2970.55,1672.72 h40 r270; Top Overlay "RTS" at 2761.89,2000.47 h40 r270; Top Overlay "RX" at 2868.19,1971.85 h40 r270; Top Overlay "TX" at 2970.55,1971.85 h40 r270